# EAGLE board PowerUnit-Bseries(ver1.0) (EAGLE 9.6.2)
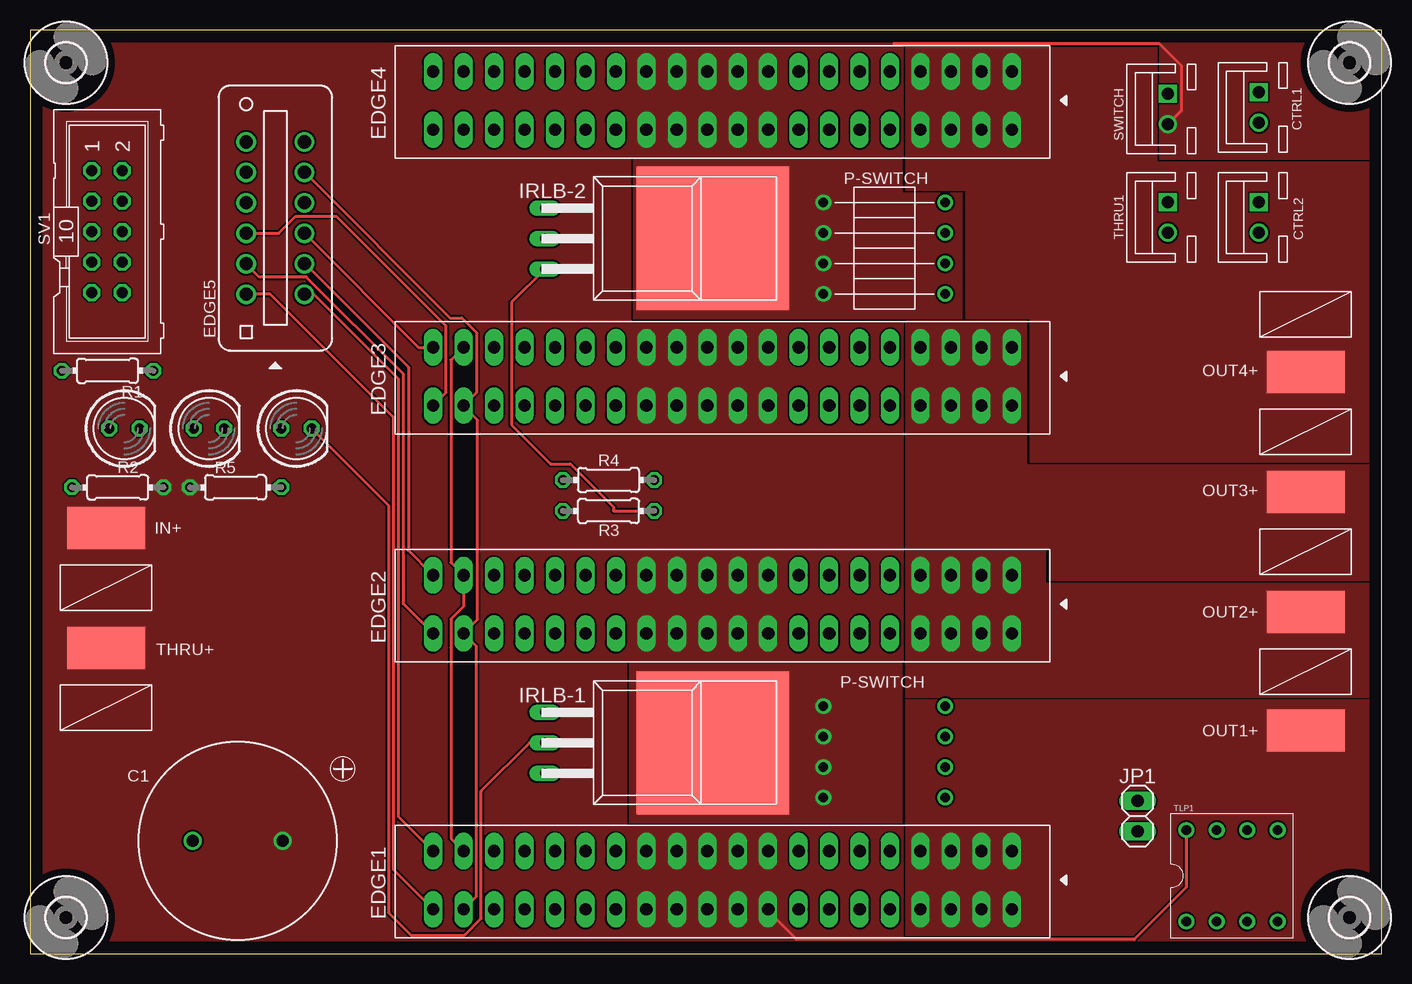
[diagram p0: board, top side]
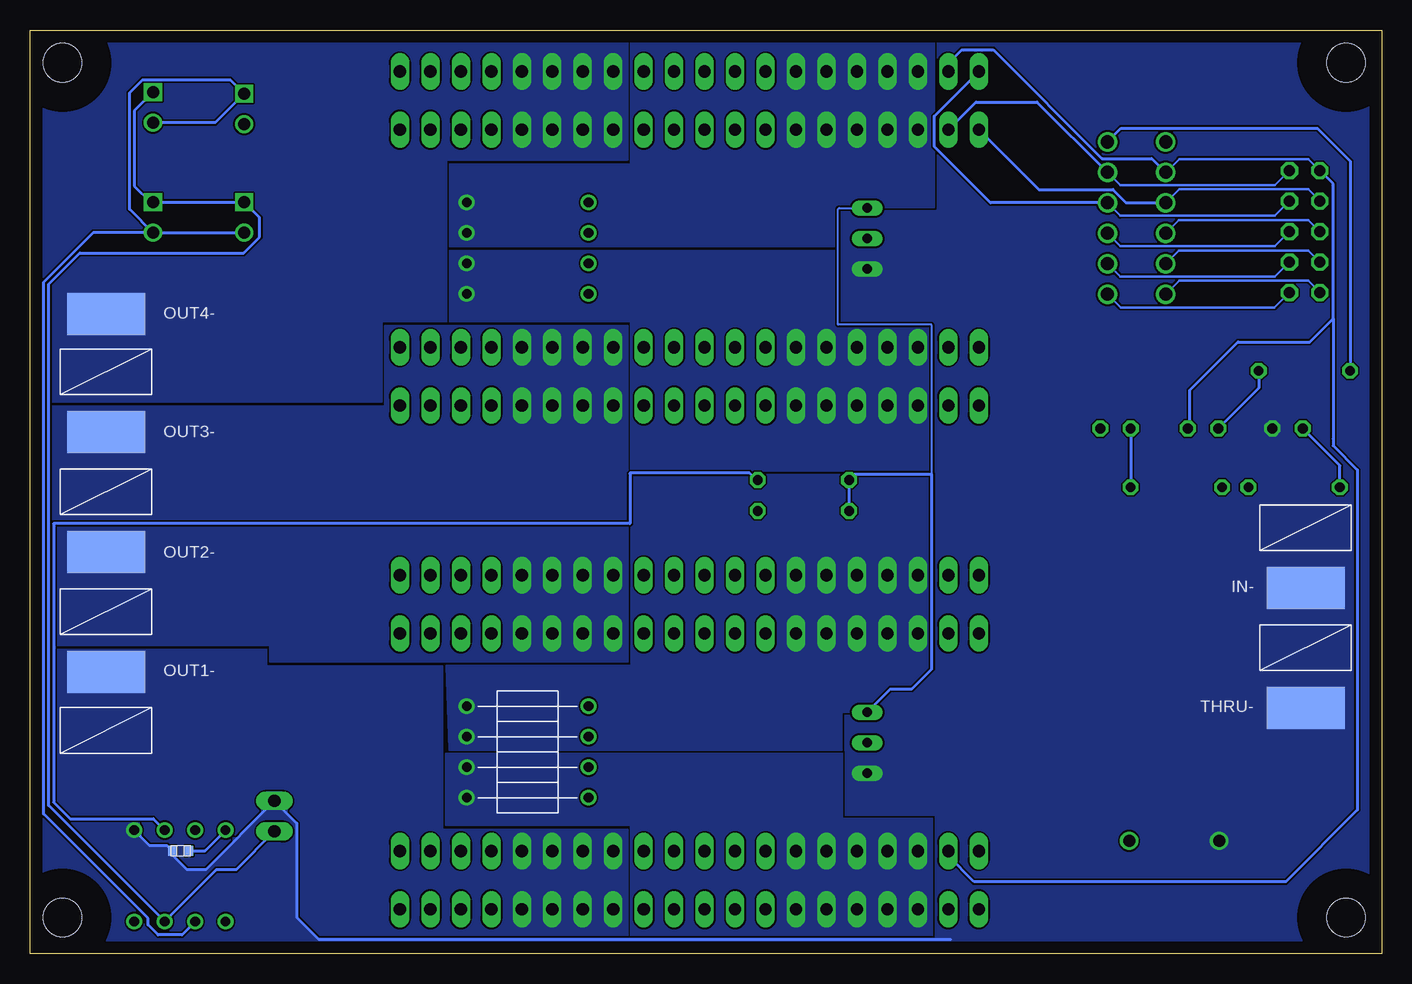
[diagram p1: board, bottom side, seen from below]

Size 112.7 x 77 mm. Coordinates in mm from the lower left corner, seen from the top.
Outline: 0,0 112.7,0 112.7,77 0,77 0,0
Copper layers (1*16): Top 0.035mm / dielectric 1.5mm / Bottom 0.035mm
Design rules "default": minimum track width 6mil, minimum drill 0.35mm, track to track 6mil, track to pad 6mil, pad to pad 6mil, via to via 6mil, smd to smd 6mil, copper to edge 40mil, drill to drill 6mil, minimum pad ring 10mil, minimum via ring 8mil, stop-mask expansion 4mil, vias tented up to drill 0mil, thermal gap 10mil

## Footprints (pad centres in the part's own frame; a part is rotated, then mirrored left to right if it is on the bottom)
50ZLH1000MEFC16X25 = drill 1: A 3.75,0; C -3.75,0
GCM188L81H104KA57 = smd 0.7 x 0.8: P$1 -0.7,0; P$2 0.7,0
B2B-XH = drill 1 square: 1 1.27,0 | drill 1: 2 -1.27,0
EDGE20X2 = drill 1.016 long: P$1 -2.54,22.86; P$2 -2.54,20.32; P$3 -2.54,17.78; P$4 -2.54,15.24; P$5 -2.54,12.7; P$6 -2.54,10.16; P$7 -2.54,7.62; P$8 -2.54,5.08; P$9 -2.54,2.54; P$10 -2.54,0; P$11 -2.54,-2.54; P$12 -2.54,-5.08; P$13 -2.54,-7.62; P$14 -2.54,-10.16; P$15 -2.54,-12.7; P$16 -2.54,-15.24; P$17 -2.54,-17.78; P$18 -2.54,-20.32; P$19 -2.54,-22.86; P$20 -2.54,-25.4; P$21 2.311,-25.4; P$22 2.311,-22.86; P$23 2.311,-20.32; P$24 2.311,-17.78; P$25 2.311,-15.24; P$26 2.311,-12.7; P$27 2.311,-10.16; P$28 2.311,-7.62; P$29 2.311,-5.08; P$30 2.311,-2.54; P$31 2.311,0; P$32 2.311,2.54; P$33 2.311,5.08; P$34 2.311,7.62; P$35 2.311,10.16; P$36 2.311,12.7; P$37 2.311,15.24; P$38 2.311,17.78; P$39 2.311,20.32; P$40 2.311,22.86
7-5530843-6 = drill 1.092: P$1 -6.35,-2.426; P$2 -3.81,-2.426; P$3 -1.27,-2.426; P$4 1.27,-2.426; P$5 3.81,-2.426; P$6 6.35,-2.426; P$7 6.35,2.426; P$8 3.81,2.426; P$9 1.27,2.426; P$10 -1.27,2.426; P$11 -3.81,2.426; P$12 -6.35,2.426
3,2 = hole 3.2: 0,0
AWG14 = smd 3.5 x 6.5: P$1 0,0
TO-220AB-PUT = drill 0.8 long: D 0,-5.08; G -2.54,-5.08; S 2.54,-5.08 | smd 11.938 x 12.7: P$1 0,8.915
1X02 = drill 1.016 long: 1 -1.27,0; 2 1.27,0
LED5MM = drill 0.813 octagon: A -1.27,0; K 1.27,0
P-SWITCH = drill 0.8: P$1 0,-2.54; P$2 0,7.62
0204/7 = drill 0.813 octagon: 1 -3.81,0; 2 3.81,0
ML10 = drill 0.914 octagon: 1 -5.08,-1.27; 2 -5.08,1.27; 3 -2.54,-1.27; 4 -2.54,1.27; 5 0,-1.27; 6 0,1.27; 7 2.54,-1.27; 8 2.54,1.27; 9 5.08,-1.27; 10 5.08,1.27
2227MC-08-03 = drill 0.8: P$1 -3.81,-3.81; P$2 -1.27,-3.81; P$3 1.27,-3.81; P$4 3.81,-3.81; P$5 3.81,3.81; P$6 1.27,3.81; P$7 -1.27,3.81; P$8 -3.81,3.81

## Placement (x,y rotation side)
C1  50ZLH1000MEFC16X25  [50ZLH1000MEFC16X25]  17.32,9.4 0 top
C2  GCM188L81H104KA57  [GCM188L81H104KA57]  100.14,8.56 180 bottom
CTRL1  02-JST  [B2B-XH]  102.45,70.55 90 top
CTRL2  02-JST  [B2B-XH]  102.45,61.37 90 top
EDGE1  EDGE20X2  [EDGE20X2]  59,6 270 top
EDGE2  EDGE20X2  [EDGE20X2]  59,29 270 top
EDGE3  EDGE20X2  [EDGE20X2]  59,48 270 top
EDGE4  EDGE20X2  [EDGE20X2]  59,71 270 top
EDGE5  7-5530843-6  [7-5530843-6]  20.45,61.32 90 top
H1  MOUNT-HOLE3.2  [3,2]  3,3 0 top
H2  MOUNT-HOLE3.2  [3,2]  3,74.27 0 top
H3  MOUNT-HOLE3.2  [3,2]  110,3 0 top
H4  MOUNT-HOLE3.2  [3,2]  110,74.27 0 top
IN+  PADS14  [AWG14]  6.35,35.5 90 top
IN-  PADS14  [AWG14]  6.35,30.5 90 bottom
IRLB-1  IRLB3813_2  [TO-220AB-PUT]  48,17.57 270 top
IRLB-2  IRLB3813_2  [TO-220AB-PUT]  48,59.62 270 top
JP1  [1X02]  92.33,11.45 270 top
LED1  [LED5MM]  7.86,43.77 0 top
LED2  [LED5MM]  14.91,43.77 0 top
LED3  [LED5MM]  22.21,43.77 0 top
OUT1+  PADS14  [AWG14]  106.35,18.6 270 top
OUT1-  PADS14  [AWG14]  106.35,23.5 270 bottom
OUT2+  PADS14  [AWG14]  106.35,28.5 270 top
OUT2-  PADS14  [AWG14]  106.35,33.5 270 bottom
OUT3+  PADS14  [AWG14]  106.35,38.5 270 top
OUT3-  PADS14  [AWG14]  106.35,43.5 270 bottom
OUT4+  PADS14  [AWG14]  106.35,48.5 270 top
OUT4-  PADS14  [AWG14]  106.35,53.3 270 bottom
P-1  P-SWITCH  [P-SWITCH]  73.76,13 270 bottom
P-2  P-SWITCH  [P-SWITCH]  73.76,15.54 270 bottom
P-3  P-SWITCH  [P-SWITCH]  73.76,18.08 270 bottom
P-4  P-SWITCH  [P-SWITCH]  73.76,20.62 270 bottom
P-5  P-SWITCH  [P-SWITCH]  73.76,55 90 top
P-6  P-SWITCH  [P-SWITCH]  73.76,57.54 90 top
P-7  P-SWITCH  [P-SWITCH]  73.76,60.08 90 top
P-8  P-SWITCH  [P-SWITCH]  73.76,62.62 90 top
R1  100  [0204/7]  6.46,48.59 0 top
R2  680  [0204/7]  7.31,38.87 0 top
R3  1kΩ  [0204/7]  48.23,39.48 180 top
R4  10kΩ  [0204/7]  48.23,36.9 0 top
R5  680  [0204/7]  17.14,38.87 180 top
SV1  [ML10]  6.43,60.19 270 top
SWITCH  02-JST  [B2B-XH]  94.85,70.42 90 top
THRU1  02-JST  [B2B-XH]  94.85,61.37 90 top
THRU+  PADS14  [AWG14]  6.35,25.5 90 top
THRU-  PADS14  [AWG14]  6.35,20.5 90 bottom
TLP1  2227MC-08-03  [2227MC-08-03]  100.2,6.48 0 top

## Library data of the parts
C1 = 50ZLH1000MEFC16X25(1000uF)
C2 = GCM188L81H104K57(0.1uF)
CTRL1 CTRL2 SWITCH THRU1 = con-jst-xh
EDGE1-EDGE4 = Edge20x2
EDGE5 = 7-5530843-6
H1-H4 = holes
IN+ IN- IRLB-1 IRLB-2 OUT1+ OUT1- OUT2+ OUT2- OUT3+ OUT3- OUT4+ OUT4- P-1-P-8 THRU+ THRU- = OKUDA_libraries
JP1 = pinhead
LED1-LED3 = led
R1-R5 = rcl; SPICEPREFIX: R
SV1 = con-ml; OC_FARNELL: unknown; OC_NEWARK: unknown
TLP1 = TLP250H

## Nets
DIR1: EDGE1.P$21 EDGE5.P$12 SV1.9
DIR2: EDGE2.P$21 EDGE5.P$11 SV1.7
DIR3: EDGE3.P$21 EDGE5.P$10 SV1.5
DIR4: EDGE4.P$21 EDGE5.P$9 SV1.3
GND: C1.C C2.P$2 IN-.P$1 IRLB-1.S IRLB-2.S JP1.1 LED1.K R4.2 THRU-.P$1 TLP1.P$5
GND2: EDGE1.P$19 EDGE2.P$19 EDGE3.P$19 EDGE4.P$19 EDGE5.P$8 LED2.K SV1.1
LED: EDGE5.P$6 R1.1
N$1: EDGE1.P$5 EDGE1.P$6 EDGE1.P$7 EDGE1.P$8 EDGE1.P$33 EDGE1.P$34 EDGE1.P$35 EDGE1.P$36 OUT1-.P$1
N$2: EDGE2.P$5 EDGE2.P$6 EDGE2.P$7 EDGE2.P$8 EDGE2.P$33 EDGE2.P$34 EDGE2.P$35 EDGE2.P$36 OUT2-.P$1
N$3: LED3.A R5.1
N$4: EDGE1.P$14 EDGE1.P$15 EDGE1.P$16 EDGE1.P$17 EDGE1.P$18 EDGE1.P$23 EDGE1.P$24 EDGE1.P$25 EDGE1.P$26 EDGE1.P$27 P-1.P$1 P-2.P$1
N$5: EDGE2.P$1 EDGE2.P$2 EDGE2.P$3 EDGE2.P$4 EDGE2.P$37 EDGE2.P$38 EDGE2.P$39 EDGE2.P$40 OUT2+.P$1
N$6: EDGE4.P$5 EDGE4.P$6 EDGE4.P$7 EDGE4.P$8 EDGE4.P$33 EDGE4.P$34 EDGE4.P$35 EDGE4.P$36 OUT4-.P$1
N$7: EDGE3.P$5 EDGE3.P$6 EDGE3.P$7 EDGE3.P$8 EDGE3.P$33 EDGE3.P$34 EDGE3.P$35 EDGE3.P$36 OUT3-.P$1
N$8: EDGE4.P$1 EDGE4.P$2 EDGE4.P$3 EDGE4.P$4 EDGE4.P$37 EDGE4.P$38 EDGE4.P$39 EDGE4.P$40 OUT4+.P$1
N$9: EDGE3.P$14 EDGE3.P$15 EDGE3.P$16 EDGE3.P$17 EDGE3.P$18 EDGE3.P$23 EDGE3.P$24 EDGE3.P$25 EDGE3.P$26 EDGE3.P$27 P-5.P$1 P-6.P$1
N$11: EDGE4.P$14 EDGE4.P$15 EDGE4.P$16 EDGE4.P$17 EDGE4.P$18 EDGE4.P$23 EDGE4.P$24 EDGE4.P$25 EDGE4.P$26 EDGE4.P$27 P-7.P$1 P-8.P$1
N$17: LED1.A R2.1
N$18: LED2.A R1.2
N$19: CTRL1.2 CTRL2.2 SWITCH.1 THRU1.2 TLP1.P$2
N$20: R3.1 TLP1.P$6
N$21: CTRL1.1 CTRL2.1 JP1.2 THRU1.1 TLP1.P$3
N$22: IRLB-1.G IRLB-2.G R3.2 R4.1
N$23: IRLB-1.P$1 P-1.P$2 P-2.P$2 P-3.P$2 P-4.P$2
N$24: IRLB-1.D LED3.K
N$27: IRLB-2.P$1 P-5.P$2 P-6.P$2 P-7.P$2 P-8.P$2
N$28: EDGE1.P$1 EDGE1.P$2 EDGE1.P$3 EDGE1.P$4 EDGE1.P$37 EDGE1.P$38 EDGE1.P$39 EDGE1.P$40 OUT1+.P$1
N$34: EDGE2.P$14 EDGE2.P$15 EDGE2.P$16 EDGE2.P$17 EDGE2.P$18 EDGE2.P$23 EDGE2.P$24 EDGE2.P$25 EDGE2.P$26 EDGE2.P$27 P-3.P$1 P-4.P$1
N$35: EDGE3.P$1 EDGE3.P$2 EDGE3.P$3 EDGE3.P$4 EDGE3.P$37 EDGE3.P$38 EDGE3.P$39 EDGE3.P$40 OUT3+.P$1
NC: EDGE5.P$7
PWM1: EDGE1.P$20 EDGE5.P$1 SV1.10
PWM2: EDGE2.P$20 EDGE5.P$2 SV1.8
PWM3: EDGE3.P$20 EDGE5.P$3 SV1.6
PWM4: EDGE4.P$20 EDGE5.P$4 SV1.4
VCC: C1.A C2.P$1 EDGE1.P$9 EDGE1.P$10 EDGE1.P$11 EDGE1.P$12 EDGE1.P$13 EDGE1.P$28 EDGE1.P$29 EDGE1.P$30 EDGE1.P$31 EDGE1.P$32 EDGE2.P$9 EDGE2.P$10 EDGE2.P$11 EDGE2.P$12 EDGE2.P$13 EDGE2.P$28 EDGE2.P$29 EDGE2.P$30 EDGE2.P$31 EDGE2.P$32 EDGE3.P$9 EDGE3.P$10 EDGE3.P$11 EDGE3.P$12 EDGE3.P$13 EDGE3.P$28 EDGE3.P$29 EDGE3.P$30 EDGE3.P$31 EDGE3.P$32 EDGE4.P$9 EDGE4.P$10 EDGE4.P$11 EDGE4.P$12 EDGE4.P$13 EDGE4.P$28 EDGE4.P$29 EDGE4.P$30 EDGE4.P$31 EDGE4.P$32 IN+.P$1 R2.2 R5.2 SWITCH.2 THRU+.P$1 TLP1.P$8
VCC2: EDGE1.P$22 EDGE2.P$22 EDGE3.P$22 EDGE4.P$22 EDGE5.P$5 SV1.2

## Tracks (layer width: path | path; a pad name or v marks a point on that pad's centre or on a via)
DIR1
  Top 0.254: EDGE1.P$21 30.3,6.99 30.3,44.7 20.03,54.97 EDGE5.P$12
  Bottom 0.19: SV1.9 6.14,56.09 16.91,56.09 EDGE5.P$12
DIR2
  Top 0.254: EDGE5.P$11 18.03,57.49 19.1,56.41 23.03,56.41 31.14,48.3 31.14,29.14 EDGE2.P$21
  Bottom 0.19: SV1.7 6.13,58.62 16.92,58.62 EDGE5.P$11
DIR3
  Top 0.254: EDGE5.P$10 20.73,60.05 22.16,61.48 25.52,61.48 34.67,52.33 34.67,46.76 EDGE3.P$21
  Bottom 0.19: SV1.5 6.13,61.16 16.92,61.16 EDGE5.P$10
DIR4
  Bottom 0.19: SV1.3 6.14,63.71 16.91,63.71 EDGE5.P$9
  Bottom 0.254: EDGE5.P$9 21.32,62.59 22.42,63.69 28.6,63.69 EDGE4.P$21
GND
  Top 0.254: 43.96,15.03 IRLB-1.S | IRLB-2.S 40.15,54.31 40.15,44.08 43.41,40.82 45.05,40.82 48.64,37.23 48.64,36.9 R4.2
  Bottom 0.254: TLP1.P$5 102.73,9 101.28,9 C2.P$2 100.84,8.23 99.61,7 98.05,7 JP1.1 90.47,10.86 90.47,3.02 88.63,1.18 35.95,1.18
  pour Bottom (rank 3, no thermals): -5,78 -5,-3 116,-3 116,79 -4,79
GND2
  Top 0.254: EDGE3.P$19 35.09,49.49 35.09,32.59 EDGE2.P$19 36.14,28.92 35.1,27.88 35.1,25.5 35.11,25.48 35.11,9.57 EDGE1.P$19
  Bottom 0.19: SV1.1 6.14,66.25 16.91,66.25 EDGE5.P$8
  Bottom 0.254: EDGE4.P$19 36.14,74.23 35.03,75.34 32.39,75.34 23.34,66.29 19.19,66.29 EDGE5.P$8 | LED2.K 16,43.95 16,47 12,51 6,51 4.06,52.94 | SV1.1 4.06,64.17 4.06,52.94 | 36.14,50.14 EDGE3.P$19 | 4.06,52.94 4.06,42.93 4.07,42.92 4.07,42.35 2.04,40.32 2.04,11.96 8,6 34,6 36.14,8.14 EDGE1.P$19
LED
  Bottom 0.254: EDGE5.P$6 21.75,68.8 5.38,68.8 2.65,66.07 R1.1
N$1
  pour Bottom (no thermals): 114,25.36 93,25.36 93,23.97 78.33,23.97 78.33,10.37 62.9,10.37 62.9,-1 114,-1
N$2
  pour Bottom (no thermals): 114.09,35.63 62.9,35.63 62.9,24.3 63,24.32 92.68,24.32 92.68,25.67 114.09,25.67
N$3
  Bottom 0.254: LED3.A R5.1
N$4
  pour Bottom (no thermals): 78,16.69 45,16.69 45,11.28 37.51,11.28 37.51,-1 62.59,-1 62.59,10.68 78,10.68
N$5
  pour Top (no thermals): 114.67,30.83 84.65,30.83 84.65,33.49 73,33.49 73,21.41 114.67,21.41
N$6
  pour Bottom (no thermals): 62.9,77.62 62.9,66.15 78,66.15 78,52.68 83.4,52.68 83.4,45.97 113.47,45.97 113.47,77.62
N$7
  pour Bottom (no thermals): 62.9,52.37 62.9,35.94 114.05,35.94 114.05,45.65 83.08,45.65 83.09,45.66 83.09,52.37
N$8
  pour Top (no thermals): 73,78.09 73,63.68 78,63.68 78,53 83.39,53 83.39,41.01 115.67,41.01 115.67,65.94 93.92,65.94 93.92,78.09
N$9
  pour Bottom (no thermals): 45.39,58.62 45.39,52.41 37.44,52.41 37.44,40.23 62.59,40.23 62.59,52.68 77.69,52.68 77.68,58.62
N$11
  pour Bottom (no thermals): 37.35,77.59 37.35,62.17 45.37,62.17 45.37,58.93 77.69,58.93 77.69,65.82 62.59,65.82 62.59,77.59
N$17
  Bottom 0.254: R2.1 3.5,40.68 LED1.A
N$18
  Bottom 0.254: R1.2 10.27,47.14 LED2.A
N$19
  Bottom 0.254: CTRL1.2 97.26,69.28 SWITCH.1 96.01,72.85 103.32,72.85 104.41,71.77 104.41,62.06 CTRL2.2 | CTRL2.2 THRU1.2 | CTRL2.2 107.43,60.1 111.56,55.98 111.56,11.63 102.86,2.93 102.86,2.39 102.03,1.56 100.03,1.56 98.93,2.66 TLP1.P$2
N$20
  Bottom 0.152: 62.64,40.08 62.7,40.02
  Bottom 0.254: R3.1 52.14,39.48 52.74,40.08 62.64,40.08 | 62.7,40.02 62.7,35.85 110.73,35.85 110.73,12.61 109.36,11.24 102.43,11.24 TLP1.P$6
N$21
  Bottom 0.254: CTRL1.1 104,70.27 104,64 102.64,62.64 CTRL2.1 THRU1.1 93.56,61.36 93.56,59.75 94.9,58.41 108.55,58.41 111.15,55.81 111.15,12.34 TLP1.P$3 101.47,2.7 97.17,7 95.51,7 JP1.2
N$22
  Bottom 0.152: 37.52,39.96 37.52,52.37 37.57,52.42 45.34,52.42 45.34,62.08 45.26,62.16 IRLB-2.G
  Bottom 0.254: R4.1 R3.2 43.94,39.96 37.52,39.96 37.52,23.72 39.19,22.05 40.98,22.05 IRLB-1.G
N$23
  pour Top (no thermals): 49.99,24.19 49.99,10.92 72.68,10.92 72.68,15.89 72.68,24.14 50.04,24.14
N$24
  Top 0.254: LED3.K 29.88,37.37 29.88,3.41 31.75,1.54 36.23,1.54 37.62,2.93 37.62,13.55 41.64,17.57 IRLB-1.D
N$27
  pour Top (no thermals): 50.32,66.15 50.32,53 77.69,53 77.69,63.37 72.68,63.37 72.68,66.15
N$28
  pour Top (no thermals): 115,21.09 73,21.09 73,-1 115,-1
N$34
  pour Bottom (no thermals): 77.78,17 45,17 45,20.14 42.91,20.14 41,22.05 39.2,22.05 37.54,23.71 37.54,39.91 62.59,39.91 62.59,23.98 78,23.98
N$35
  pour Top (no thermals): 115.67,40.69 83.08,40.69 83.08,52.68 73,52.68 73,33.8 84.96,33.8 84.96,31.14 115.67,31.14
PWM1
  Top 0.254: EDGE5.P$1 23.66,54.97 30.71,47.92 30.71,11.43 EDGE1.P$20
  Bottom 0.19: SV1.10 8.96,53.86 21.77,53.86 EDGE5.P$1
PWM2
  Top 0.254: EDGE2.P$20 31.55,33.59 31.55,48.88 22.92,57.51 EDGE5.P$2
  Bottom 0.19: SV1.8 8.91,56.44 21.81,56.44 EDGE5.P$2
PWM3
  Top 0.254: EDGE5.P$3 32.39,50.54 EDGE3.P$20
  Bottom 0.19: SV1.6 8.91,58.98 21.81,58.98 EDGE5.P$3
PWM4
  Bottom 0.19: SV1.4 8.91,61.52 21.81,61.52 EDGE5.P$4
  Bottom 0.254: EDGE5.P$4 32.62,62.59 37.32,67.29 37.32,69.82 EDGE4.P$20
VCC
  Top 0.254: SWITCH.2 96,70.31 96,74 94.14,75.86 72,75.86 | TLP1.P$8 96.39,5.51 92.06,1.18 63.91,1.18 61.54,3.55 EDGE1.P$32
  Bottom 0.254: C2.P$1 98.12,8.56 TLP1.P$8
  pour Top (rank 3, no thermals): -7,83 -7,-4 117,-4 117,83
VCC2
  Top 0.254: EDGE1.P$22 37.19,4.74 37.19,25.64 EDGE2.P$22 37.25,27.8 37.25,44.53 36.14,45.64 EDGE3.P$22 37.21,46.76 37.21,51.79 36,53 35.01,53 EDGE5.P$5
  Bottom 0.19: SV1.2 8.91,64.06 21.81,64.06 EDGE5.P$5
  Bottom 0.254: EDGE4.P$22 33.83,71 28.75,71 EDGE5.P$5